# Altium PCB Test.PcbDoc
Units mil, origin at the board's own origin, x right, y up, seen from the top; angles counter-clockwise.
Board outline 1600 x 1050 mil, 2 copper layers (Top Layer, Bottom Layer); 9 components, 7 nets, 35 pads, 7 vias.
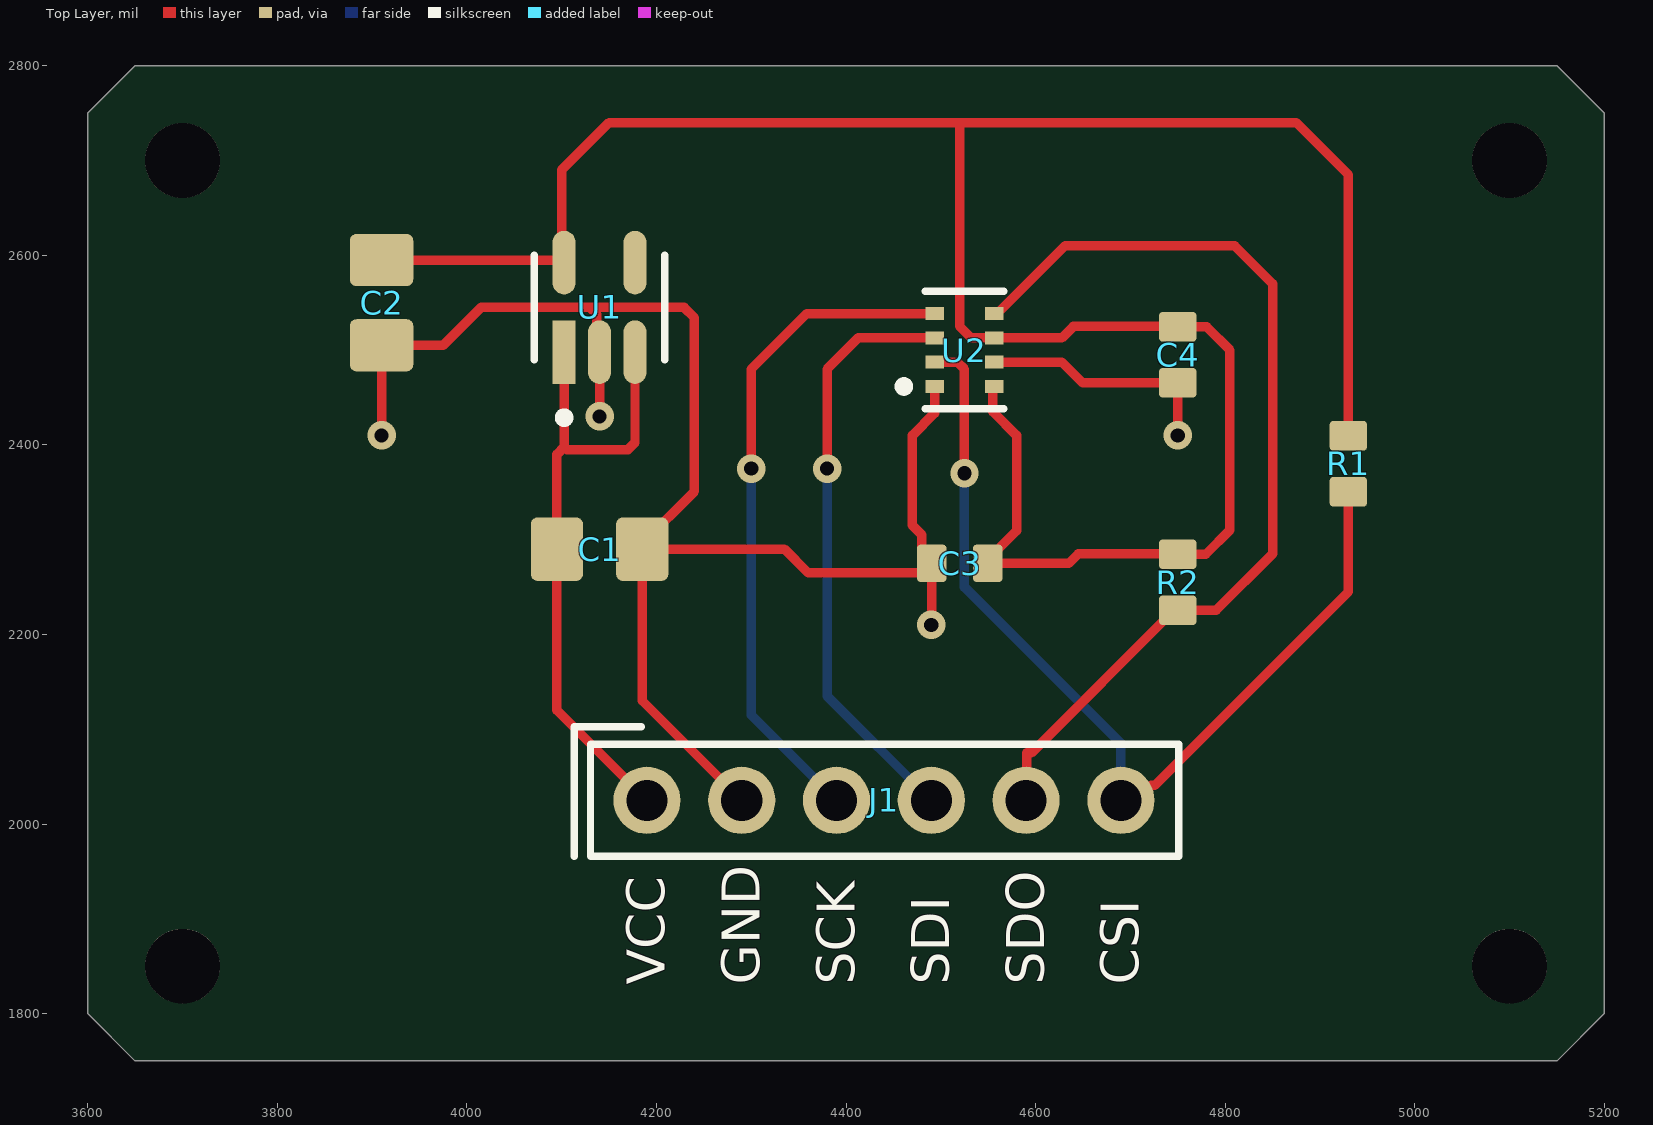
[diagram p0: Top Layer view]
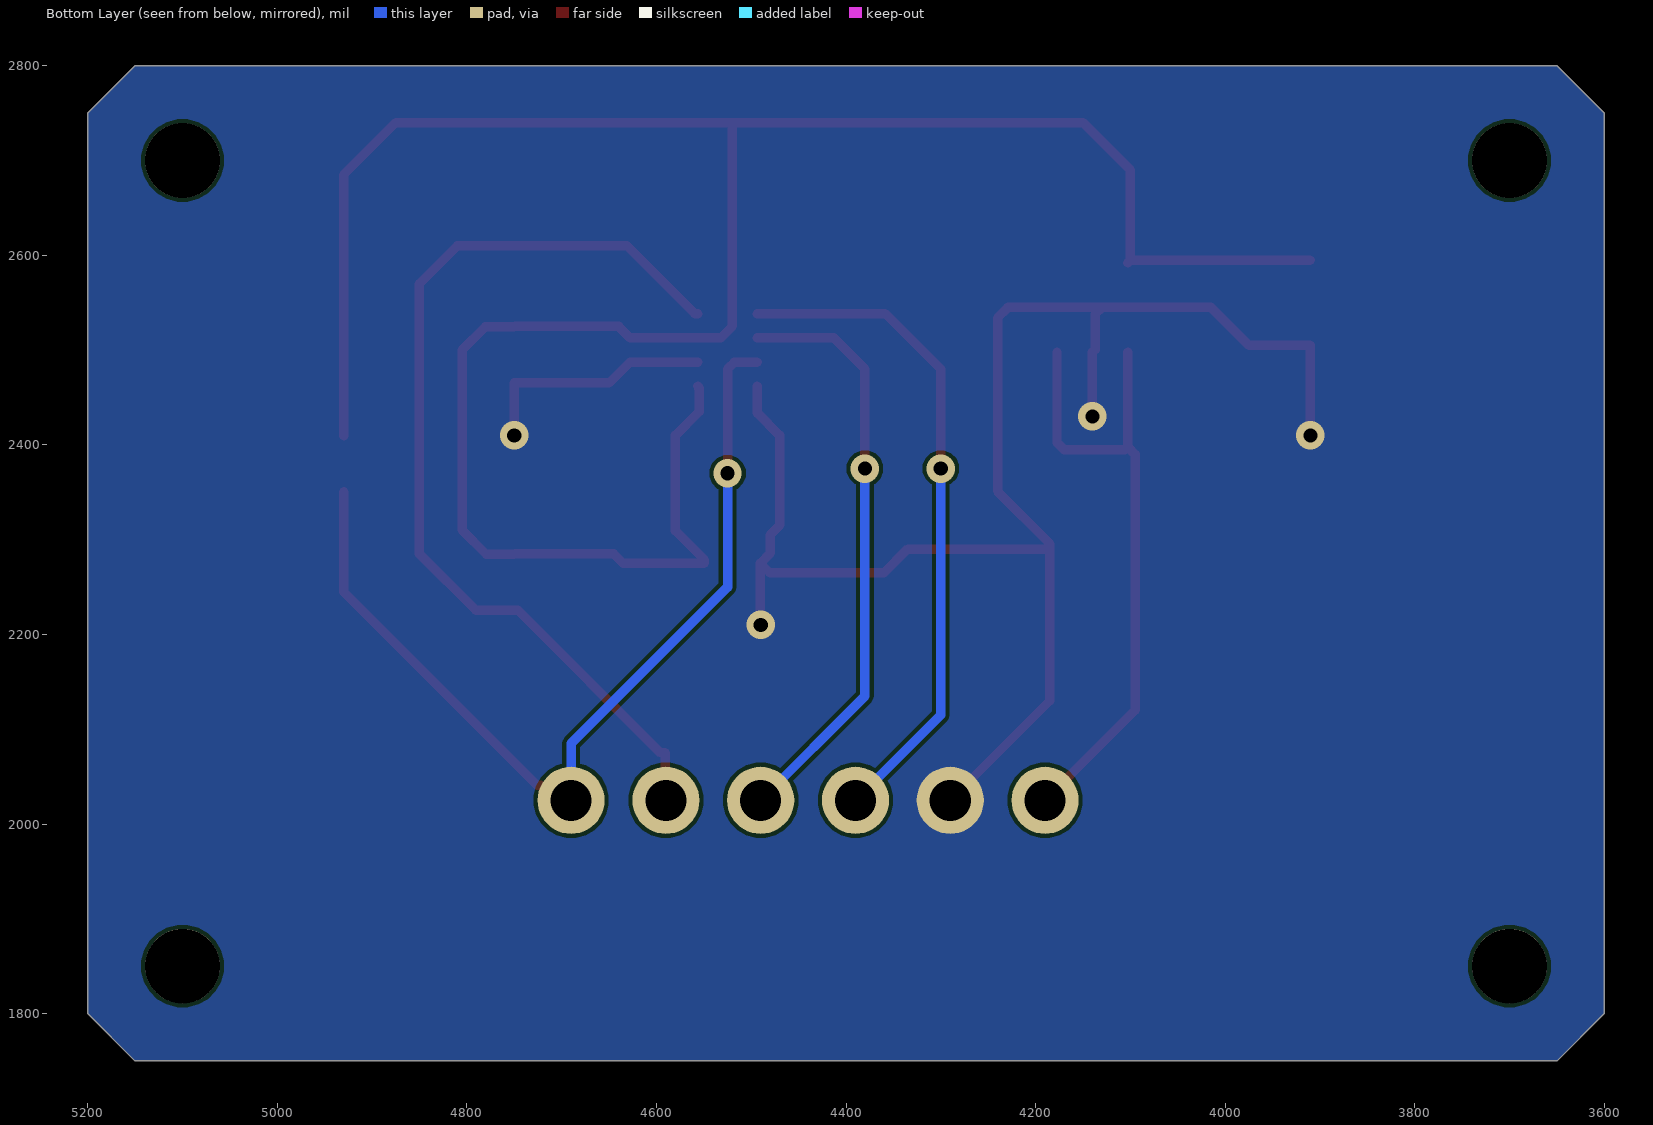
[diagram p1: Bottom Layer view, seen from below]
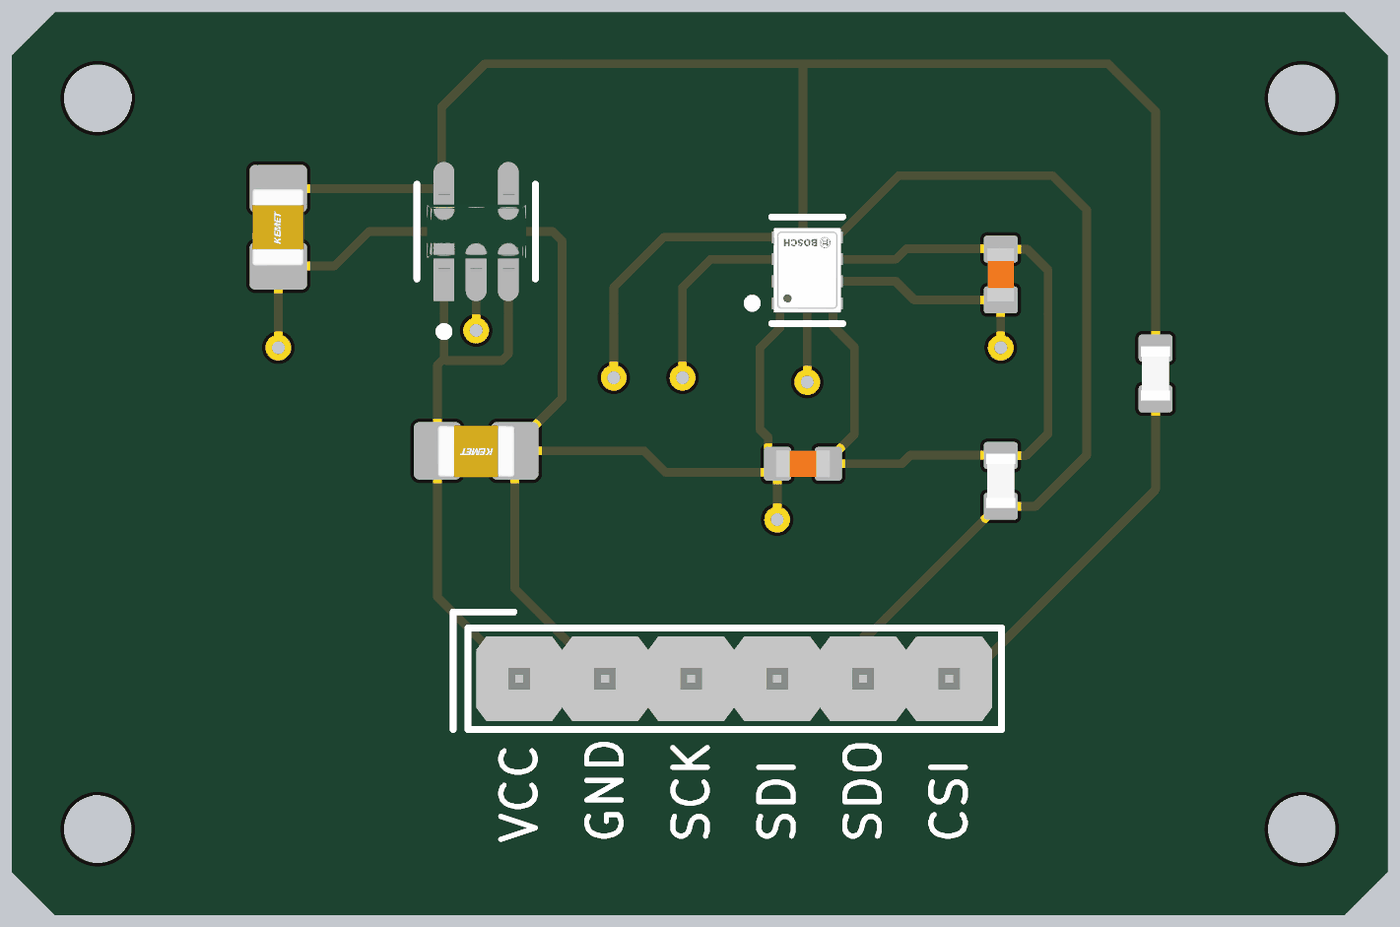
[diagram p2: 3D render of the assembled board from above, using the file's embedded part models]

## Layer stack, top to bottom
Top Solder: solder mask 0.4, Solder Resist, Dk 3.5
Top Layer: signal copper 1.4
Dielectric 1: dielectric 12.6, FR-4, Dk 4.8
Bottom Layer: signal copper 1.4
Bottom Solder: solder mask 0.4, Solder Resist, Dk 3.5

## Board outline
3600,1800 3650,1750 5150,1750 5200,1800 5200,2750 5150,2800 3650,2800 3600,2750

## Design rules (kind name [scope] priority, off if disabled: settings)
Clearance [All] p1: gap=4 ignorepadtopadclearanceinfootprint=FALSE
PolygonConnect [All] p1: connectstyle=Direct reliefconductorwidth=10 reliefentries=4 polygonreliefangle="90 Angle" airgapwidth=10
RoutingVias [All] p1: holewidth=28 width=50 viastyle="Through Hole" minholewidth=28 minwidth=50 maxholewidth=28 maxwidth=50
SolderMaskExpansion [All] p1: expansion=4 istentingtop=FALSE
SupplyNets "Schematic Supply Nets_2" [InNet('VCC')] p1: voltage=0.000
SupplyNets "Schematic Supply Nets_1" [InNet('GND')] p2: voltage=0.000
SupplyNets "Schematic Supply Nets" [InNet('3.3V')] p3: voltage=0.000
Width [All] p1: maxlimit=10 minlimit=10 preferedwidth=10
30 further rules are at their usual default settings.

## Components (designator, comment, footprint, x,y, rotation, side; value= is the part's Value field where it differs from the comment)
C1 "1uF" CAP_0805 4140,2290 r180 top
C2 "1uF" CAP_0805 3910,2550 r90 top
C3 "0.1uF" CAP_0603 4520,2275 r0 top
C4 "0.1uF" CAP_0603 4750,2495 r90 top
J1 "6 Pin Header" G800W302018EU 4440,2025 r90 top
R1 "10k" RES_0603 4930,2380 r90 top
R2 "10k" RES_0603 4750,2255 r90 top
U1 "AP2112K-3.3TRG1" FP-SOT25-IPC_A 4140,2545 r90 top
U2 "BMP280" FP-BMP280-MFG 4525,2500 r180 top

## Footprints (in the part's own frame and the unit in brackets; to place one, negate y for a bottom-side part, rotate by r counter-clockwise, add the part's x,y. Pads: shape width x height; smd on the part's side, far side on the other; paste and mask are expansions set on the pad)
CAP_0603 [mm]
  rrect25% 0.8x1 smd: 1(-0.75,0) 2(0.75,0)
  body extent -0.8,-0.4 0.8,0.4, height 0.51
CAP_0805 [mm]
  rrect25% 1.4x1.7 smd: 1(-1.143,0) 2(1.143,0)
  body extent -1.15,-0.76 1.15,0.79, height 1.01
FP-BMP280-MFG [mm]
  rect 0.5x0.35 smd paste+0 mask+0: 1(0.8,0.975) 2(0.8,0.325) 3(0.8,-0.325) 4(0.8,-0.975) 5(-0.8,-0.975) 6(-0.8,-0.325) 7(-0.8,0.325) 8(-0.8,0.975)
  silkscreen extent -1.05,-1.58 1.75,1.58, body extent -1.55,-1.8 1.55,1.8, height 0.25
FP-SOT25-IPC_A [mm]
  rect 1.707x0.616 smd paste+0 mask+0: 1(-1.201,0.95)
  rrect100% 1.707x0.616 smd paste+0 mask+0: 2(-1.201,0) 3(-1.201,-0.95) 4(1.201,-0.95) 5(1.201,0.95)
  silkscreen extent -3.08,-1.75 1.4,1.75, body extent -2.55,-2 2.55,2, height 0.25
G800W302018EU [mm]
  round 1.8 hole 1.1 mask+0.07: 1(0,6.35) 2(0,3.81) 3(0,1.27) 4(0,-1.27) 5(0,-3.81) 6(0,-6.35)
  silkscreen extent -1.5,-7.9 1.97,8.3, body extent -1.25,-7.62 1.25,7.62, height 8.61
RES_0603 [mm]
  rrect25% 0.8x1 smd: 1(-0.75,0) 2(0.75,0)
  body extent -0.8,-0.43 0.8,0.43, height 0.52

## Part data
C1 C2: library part CAP_0805, "Capacitor SMD 0805"
C3 C4: library part CAP_0603, "Capacitor SMD 0603"
J1: library part G800W302018EU, "Pin Header 6 Position 2.54mm Pitch", Manufacturer=Amphenol, Manufacturer Part Number=G800W302018EU
R1 R2: library part RES_0603, "Resistor SMD 0603"
U1: library part CMP-12756-000035-1, "IC REG LINEAR 3.3V 600MA SOT25", Case/Package=SOT-23-5, Dropout Voltage=250mV, Max Input Voltage=6V, Max Operating Temperature=85°C, Max Output Current=600mA, Min Input Voltage=2.5V, Min Operating Temperature=-40°C, Output Voltage=3.3V, Package Quantity=1, Quiescent Current=55uA, Accuracy=1.5%, Height=1.3mm, Lead Free="Lead Free", Length=3.1mm, Mount="Surface Mount", Number of Outputs=1, Number of Pins=5, Number of Regulators=1, Output Current=600mA, Output Type=Fixed, Packaging="Tape and Reel", Polarity=Positive, Width=1.7mm
U2: library part CMP-2000-05076-3, "SENSOR PRESSURE ABS", Case/Package=SMD/SMT, Max Operating Temperature=85°C, Min Operating Temperature=-40°C, Operating Pressure=15.95PSI, Lead Free="Lead Free", Max Pressure=290.08PSI, Number of Pins=8, Output Type=SPI, Port Style="No Port", Pressure Type=Absolute, Termination=SMD/SMT

## Free pads (board coordinates)
  round 78.74 hole 78.74 unplated: 2(3700,1850) 2(3700,2700) 2(5100,1850) 2(5100,2700)

## Via types
v1: diameter 30, hole 15, Top Layer to Bottom Layer, 7 vias

## Nets (pads, with @x,y where several pads share a name; then routed paths per layer and width w, separated by ;. In a path a pad name is that pad's centre, name@x,y a point inside that pad or via, vN(x,y) a via of type N, cw(c..) or ccw(c..) an arc to the next point about the centre after c; other vN are vias at no path point)
3.3V: C2.2 C3.2 C4.2 R1.2 R2.2 U1.5 U2.6 U2.8 | length 2632.5
  Top Layer w10: C2.2 4099.86,2595 U1.5 4100,2594.86 4100,2690 4150,2740 4520,2740 ; U2.8 4555,2460.12 4555,2435 4580,2410 4580,2309.41 4549.53,2278.94 C3.2 4635,2275 4645,2285 4749.53,2285 R2.2 4779.53,2284.53 4805,2310 4805,2500 4780.47,2524.53 C4.2 4749.53,2525 4640,2525 4627.8,2512.8 U2.6 4532.2,2512.8 4520,2525 4520,2740 ; R1.2 4930,2685 4875,2740 4520,2740
CSI: J1.6 R1.1 U2.2 | length 994.4
  Top Layer w10: U2.2 4517.8,2487.2 4525,2480 v1(4525,2370) ; J1.6 4706.47,2025 4722.13,2040.66 4725.66,2040.66 4930,2245 R1.1
  Bottom Layer w10: v1(4525,2370) 4525,2250 4690,2085 J1.6
GND: C1.1 C2.1 C3.1 C4.1 J1.2 U1.2 U2.1 U2.7 | length 1988.6
  Top Layer w10: v1(3910,2410) C2.1 3975,2505 4015,2545 4130,2545 ; v1(4140,2430) U1.2 4137.27,2500.46 4137.27,2537.73 4130,2545 ; J1.2 4185,2130 C1.1 ; v1(4490,2210) 4490.24,2210.24 4490.24,2274.76 C3.1 ; U2.1 4493.5,2433.5 4470,2410 4470,2315 4479.72,2305.28 4479.72,2285.75 C3.1 ; U2.7 4627.8,2487.2 4649.53,2465.47 C4.1 v1(4750,2410) ; 4130,2545 4229.14,2545 4240,2534.14 4240,2350.91 4185,2295.91 C1.1 ; C1.1 4335,2290 4360,2265 4480.47,2265 C3.1
SCK: J1.3 U2.4 | length 710
  Top Layer w10: v1(4300,2375) 4300,2480 4358.39,2538.39 U2.4
  Bottom Layer w10: v1(4300,2375) 4300,2115 J1.3
SDI: J1.4 U2.3 | length 627.7
  Top Layer w10: v1(4380,2375) 4380,2480 4412.8,2512.8 U2.3
  Bottom Layer w10: v1(4380,2375) 4380,2135 J1.4
SDO: J1.5 R2.1 U2.5 | length 1021.2
  Top Layer w10: U2.5 4559.45,2538.39 4631.06,2610 4810,2610 4850,2570 4850,2285 4790.47,2225.47 R2.1 4746.06,2225.47 4595.59,2075 4590.86,2075 4590.86,2025.86 J1.5
VCC: C1.2 J1.1 U1.1 U1.3 | length 689.5
  Top Layer w10: U1.1 4102.6,2397.6 ; U1.3 4177.4,2402.4 4170,2395 4105.2,2395 4102.6,2397.6 ; J1.1 4095,2120 C1.2 4095,2390 4102.6,2397.6
pads on no net: U1.4

## Polygon pours and split planes (outlines as drawn)
GND on Bottom Layer "GND_L02_P001" (solid, pour order 1): 3600,1800 3650,1750 5150,1750 5200,1800 5200,2750 5150,2800 3650,2800 3600,2750
GND on Bottom Layer "GND_L02_P000" (solid, pour order 0): 3840,2660 3940,2760 4880,2760 4960,2680 4960,2140 4780,1960 4080,1960 4080,2080 3840,2320

## Silkscreen, mask and mechanical layers (free items; w line width, h text height)
Top Overlay:
  text "VCC" at 4209,1830.5 h40 r90
  text "GND" at 4309,1830.5 h40 r90
  text "SCK" at 4409,1830.5 h40 r90
  text "SDI" at 4509,1830.5 h40 r90
  text "SDO" at 4609,1830.5 h40 r90
  text "CSI" at 4709,1830.5 h40 r90
Mechanical 1:
  lines w10: 3600,1800 3600,2750 3650,2800 3700,2800 5150,2800 5200,2750 5200,1800 5150,1750 3650,1750 3600,1800